# EAGLE board main_brd_2.1 (EAGLE 9.1.0)
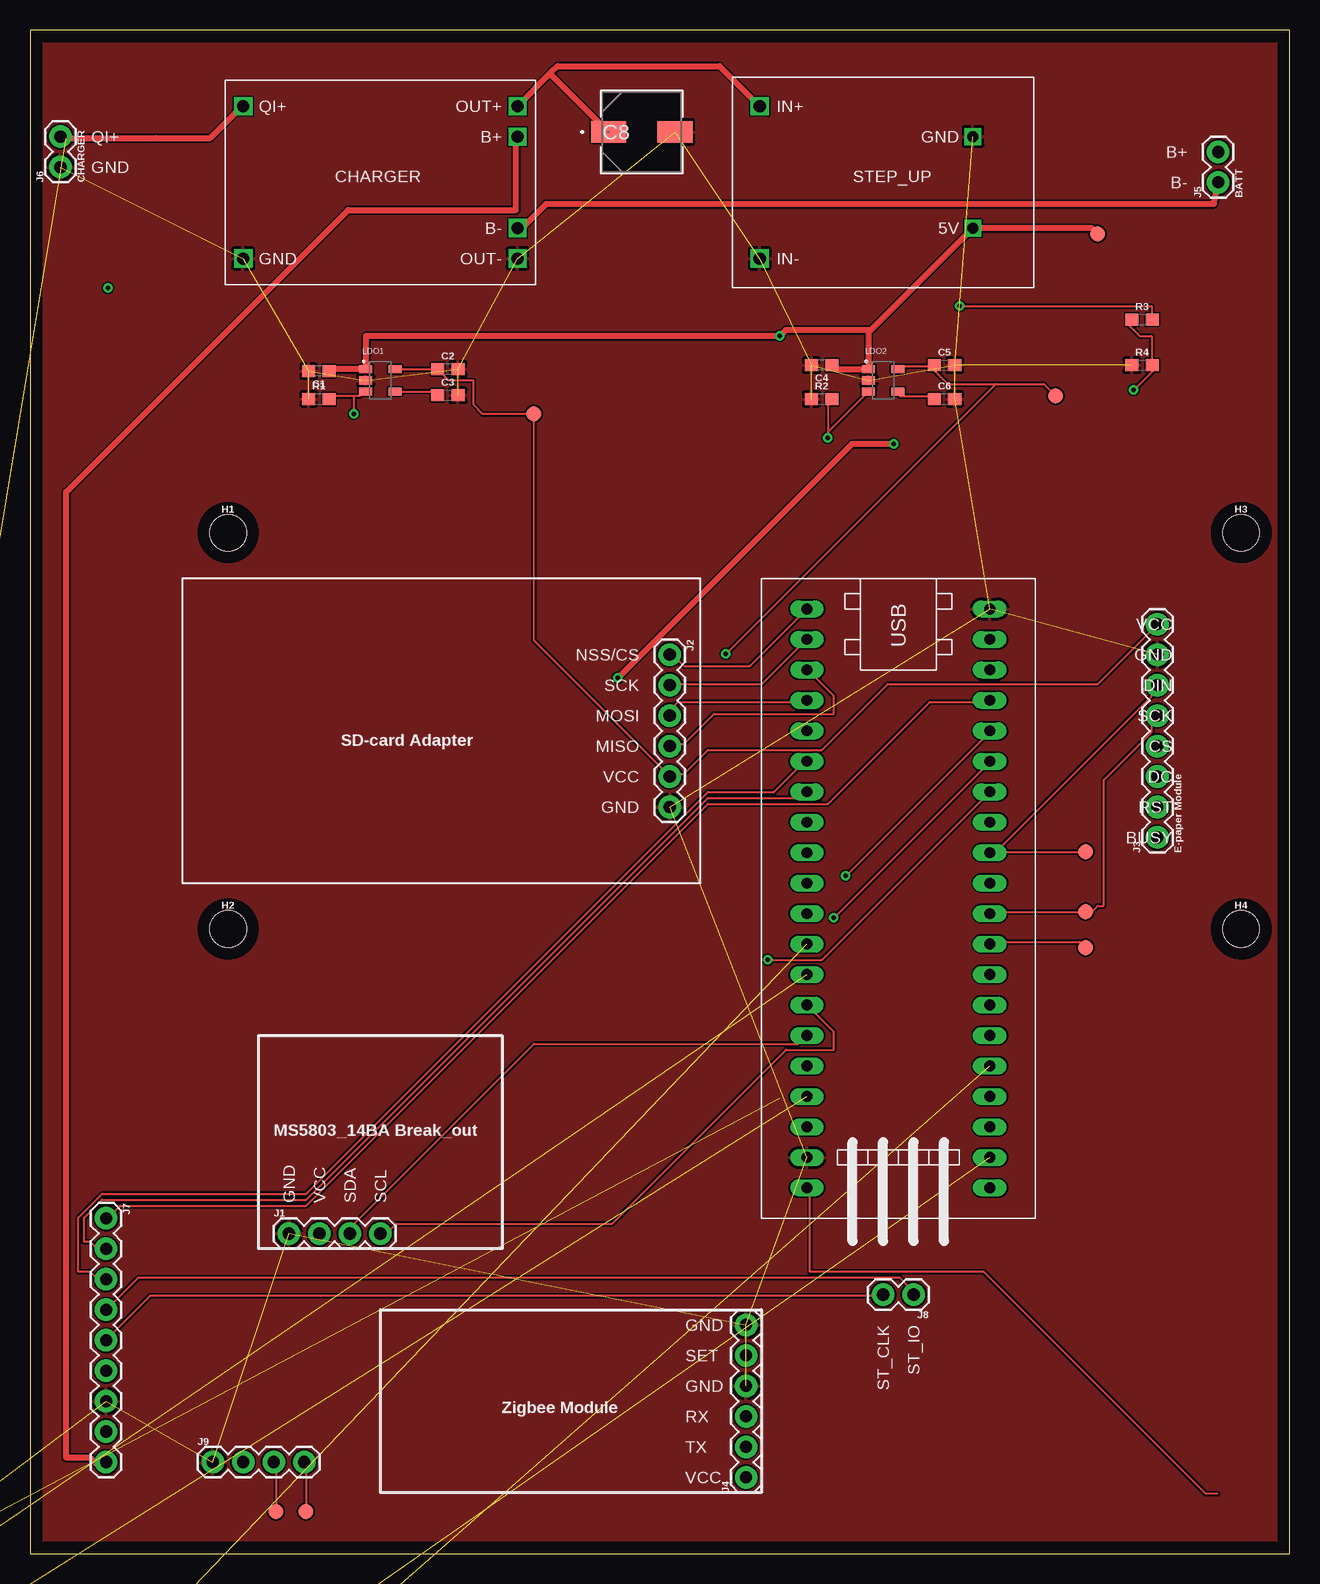
[diagram p0: board, top side]
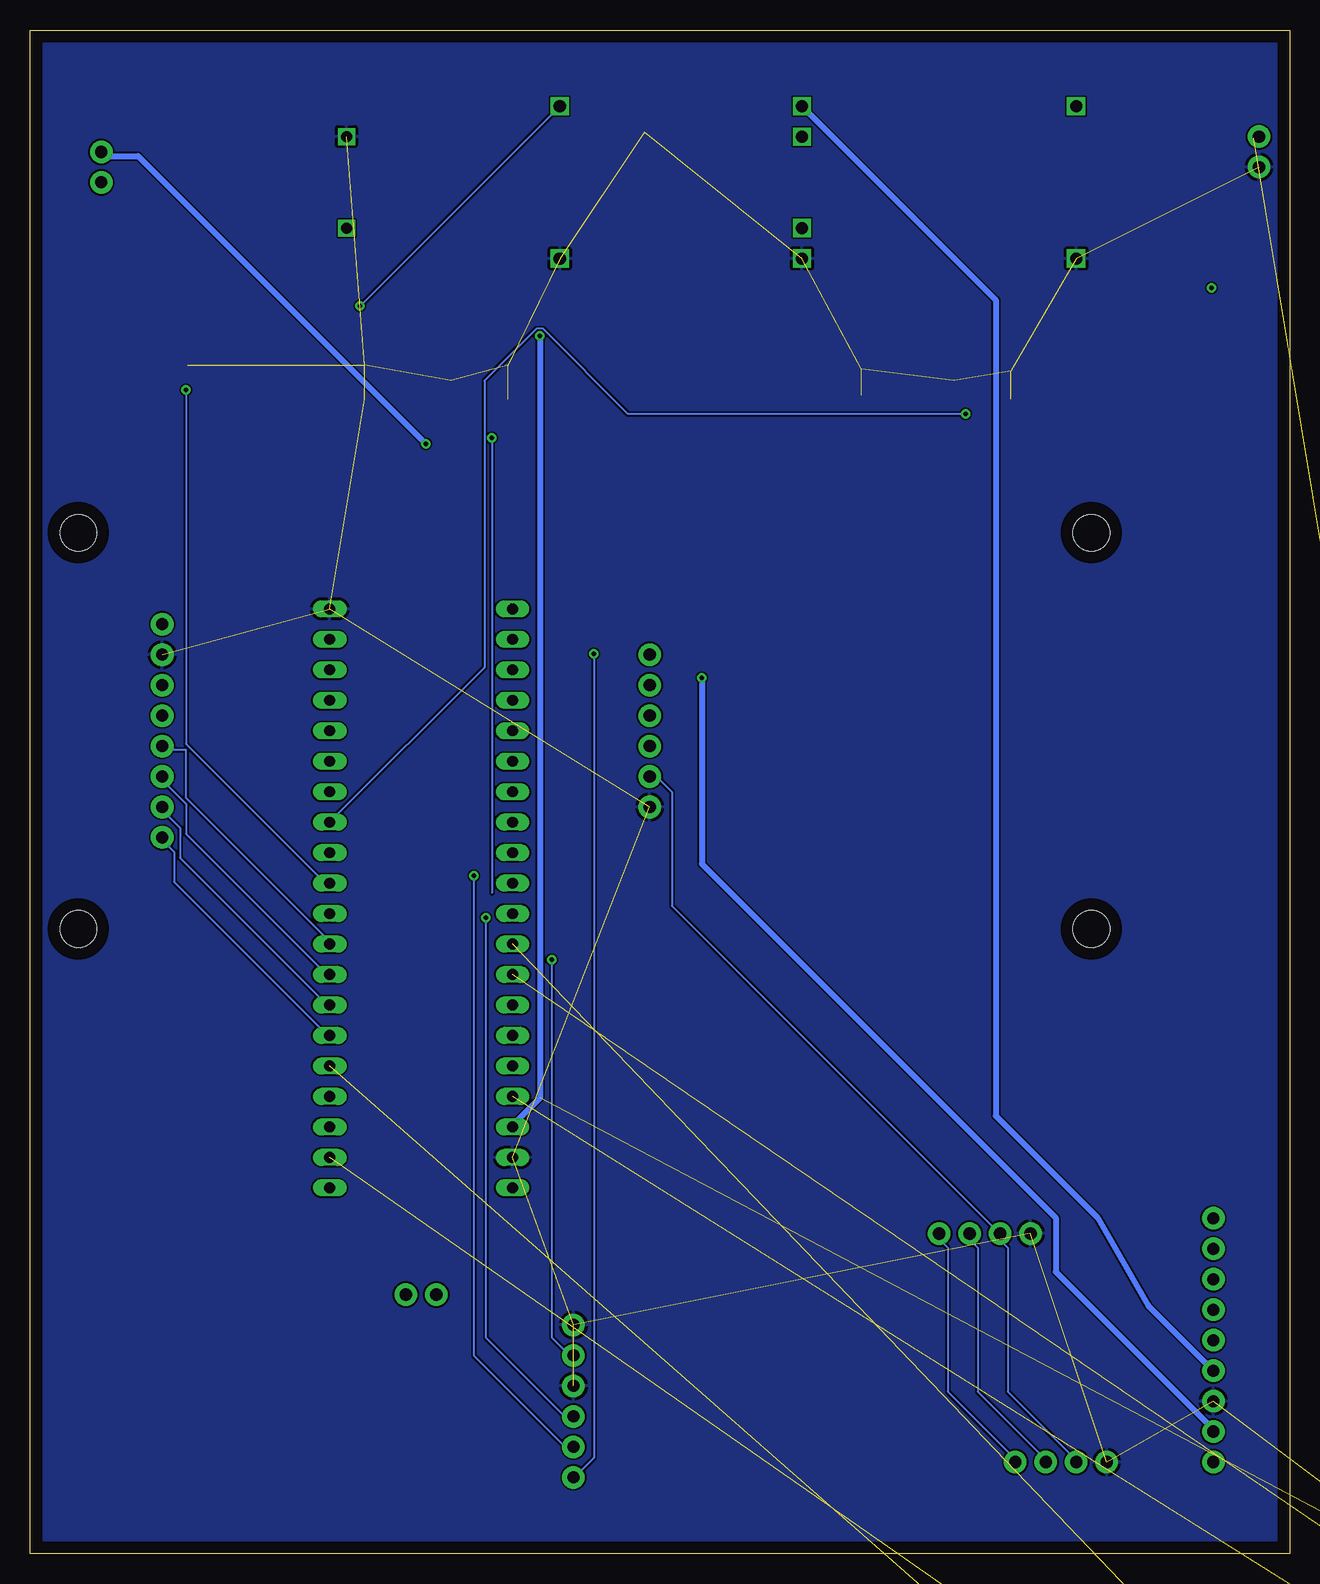
[diagram p1: board, bottom side, seen from below]

Size 105 x 127 mm. Coordinates in mm from the lower left corner, seen from the top.
Outline: 0,0 105,0 105,127 0,127 0,0
Copper layers (1*16): Top 0.035mm / dielectric 1.5mm / Bottom 0.035mm
Design rules "default *": minimum track width 6mil, minimum drill 0.35mm, track to track 6mil, track to pad 6mil, pad to pad 6mil, via to via 6mil, smd to smd 6mil, copper to edge 40mil, drill to drill 6mil, minimum pad ring 10mil, minimum via ring 8mil, stop-mask expansion 4mil, vias tented up to drill 0mil, thermal gap 10mil

## Footprints (pad centres in the part's own frame; a part is rotated, then mirrored left to right if it is on the bottom)
0603 = smd 1.1 x 1: 1 -0.85,0; 2 0.85,0
U2-K-M = smd 2.921 x 1.829: 1 -2.756,0; 2 2.756,0
C0603 = smd 1.1 x 1: 1 -0.85,0; 2 0.85,0
LED_5MM = drill 0.813 pad 1.88: A -1.27,0; K 1.27,0
STAND-OFF-TIGHT = hole 3.048: 0,0
1X04 = drill 1.016 pad 1.88: 1 0,0; 2 2.54,0; 3 5.08,0; 4 7.62,0
1X06 = drill 1.016 pad 1.88: 1 0,0; 2 2.54,0; 3 5.08,0; 4 7.62,0; 5 10.16,0; 6 12.7,0
1X08 = drill 1.016 pad 1.88: 1 0,0; 2 2.54,0; 3 5.08,0; 4 7.62,0; 5 10.16,0; 6 12.7,0; 7 15.24,0; 8 17.78,0
1X02 = drill 1.016 pad 1.88: 1 0,0; 2 2.54,0
1X09 = drill 1.016 pad 1.88: 1 0,0; 2 2.54,0; 3 5.08,0; 4 7.62,0; 5 10.16,0; 6 12.7,0; 7 15.24,0; 8 17.78,0; 9 20.32,0
SOT94P279X129-5N = smd 1.17 x 0.67: 1 -1.22,0.94; 2 -1.22,0; 3 -1.22,-0.94; 4 1.22,-0.94; 5 1.22,0.94
3,81/1,4 = drill 1.397 pad 3.81 octagon: 1 0,0
R0603 = smd 1 x 1.1: 1 -0.85,0; 2 0.85,0
PAD.03X.05 = smd 1.27 x 1.27: P$1 0,0
STM32F103C8T6-MODULE = drill 0.9 long: 3.3V_1 25.4,-7.62; 3.3V_2 -17.78,7.62; 5V 20.32,-7.62; GND_1 22.86,-7.62; GND_2 -20.32,7.62; GND_3 -22.86,7.62; PA_0 15.24,7.62; PA_1 12.7,7.62; PA_2 10.16,7.62; PA_3 7.62,7.62; PA_4 5.08,7.62; PA_5 2.54,7.62; PA_6 0,7.62; PA_7 -2.54,7.62; PA_8 -12.7,-7.62; PA_9 -10.16,-7.62; PA_10 -7.62,-7.62; PA_11 -5.08,-7.62; PA_12 -2.54,-7.62; PA_15 0,-7.62; PB_0 -5.08,7.62; PB_1 -7.62,7.62; PB_3 2.54,-7.62; PB_4 5.08,-7.62; PB_5 7.62,-7.62; PB_6 10.16,-7.62; PB_7 12.7,-7.62; PB_8 15.24,-7.62; PB_9 17.78,-7.62; PB_10 -10.16,7.62; PB_11 -12.7,7.62; PB_12 -22.86,-7.62; PB_13 -20.32,-7.62; PB_14 -17.78,-7.62; PB_15 -15.24,-7.62; PC_13 22.86,7.62; PC_14 20.32,7.62; PC_15 17.78,7.62; RESET -15.24,7.62; VB 25.4,7.62
P8 = drill 0.864 pad 1.372 square: 1 -7.62,7.62 | drill 0.864 pad 1.372: 2 -7.62,5.08; 3 -7.62,2.54; 4 -7.62,0; 5 0,0; 6 0,2.54; 7 0,5.08; 8 0,7.62
DCK5 = smd 1.168 x 0.356: 1 -0.965,0.65; 2 -0.965,0; 3 -0.965,-0.65; 4 0.965,-0.65; 5 0.965,0.65
CHARGE_MODULE = drill 1.016 square: + -11.43,6.35; - -11.43,-6.35; B+ 11.43,3.81; B- 11.43,-3.81; OUT+ 11.43,6.35; OUT- 11.43,-6.35
STEP_UP_99_69 = drill 0.9 square: 5V 7.493,-3.81; GND 7.493,3.81 | drill 1.016 square: IN+ -10.287,6.35; IN- -10.287,-6.35

## Placement (x,y rotation side)
C1  1.0uF  [0603]  24.09,98.56 180 top
C2  1.0uF  [0603]  34.83,98.75 0 top
C3  22nF  [0603]  34.83,96.56 0 top
C4  1.0uF  [0603]  66,99.06 180 top
C5  1.0uF  [0603]  76.24,99.06 0 top
C6  22nF  [0603]  76.24,96.25 0 top
C8  UWT1C221MCL1GSU2-K-M  [U2-K-M]  51,118.5 0 top
C9  .1u  [C0603]  -18,-51 0 top  (outside the outline)
D1  [LED_5MM]  -23.4,-49.2 0 top  (outside the outline)
D2  [LED_5MM]  -30,-49.2 0 top  (outside the outline)
D3  [LED_5MM]  -36.6,-49.2 0 top  (outside the outline)
H1  STAND-OFFTIGHT  [STAND-OFF-TIGHT]  16.51,85.09 0 top
H2  STAND-OFFTIGHT  [STAND-OFF-TIGHT]  16.51,52.07 0 top
H3  STAND-OFFTIGHT  [STAND-OFF-TIGHT]  100.97,85.09 0 top
H4  STAND-OFFTIGHT  [STAND-OFF-TIGHT]  100.97,52.07 0 top
J1  MS5803_14BA Break_out  [1X04]  21.59,26.67 0 top
J2  SD-card Adapter  [1X06]  53.34,74.93 270 top
J3  E-paper Module  [1X08]  93.98,59.69 90 top
J4  Zigbee Module  [1X06]  59.69,6.35 90 top
J5  BATT  [1X02]  99.06,114.3 90 top
J6  CHARGER  [1X02]  2.54,115.57 90 top
J7  POGO_PINS  [1X09]  6.35,27.94 270 top
J8  ST-LINK  [1X02]  73.66,21.59 180 top
J9  additional I2C bus  [1X04]  15.24,7.62 0 top
LDO1  RT9193-33GB  [SOT94P279X129-5N]  29.21,97.79 0 top
LDO2  RT9193-33GB  [SOT94P279X129-5N]  71.12,97.79 0 top
PAD1  [3,81/1,4]  -37.2,-82.8 0 top  (outside the outline)
PAD2  [3,81/1,4]  -37.2,-89.4 0 top  (outside the outline)
R1  22k  [0603]  24.09,96.25 0 top
R2  22k  [0603]  66,96.25 0 top
R3  22k  [0603]  92.71,102.87 0 top
R4  22k  [0603]  92.71,99.06 0 top
R5  330  [R0603]  -18,-36.5 0 top  (outside the outline)
R6  100k  [R0603]  -18,-40 0 top  (outside the outline)
R7  10k  [R0603]  -18,-43.5 0 top  (outside the outline)
R8  10k  [R0603]  -18,-26 0 top  (outside the outline)
R9  10k  [R0603]  -18,-29.5 0 top  (outside the outline)
R10  100k  [R0603]  -18,-33 0 top  (outside the outline)
R11  10k  [R0603]  -38.4,-56.4 0 top  (outside the outline)
R12  10k  [R0603]  -38.4,-60 0 top  (outside the outline)
R13  10k  [R0603]  -38.4,-65.4 0 top  (outside the outline)
R14  10k  [R0603]  -38.4,-70.8 0 top  (outside the outline)
R15  10k  [R0603]  -38.4,-76.2 0 top  (outside the outline)
TP1  TEST-POINT3X5  [PAD.03X.05]  89,110 0 top
TP2  TEST-POINT3X5  [PAD.03X.05]  20.5,3.5 0 top
TP3  TEST-POINT3X5  [PAD.03X.05]  23,3.5 0 top
TP4  TEST-POINT3X5  [PAD.03X.05]  42,95 0 top
TP5  TEST-POINT3X5  [PAD.03X.05]  85.5,96.5 0 top
TP6  TEST-POINT3X5  [PAD.03X.05]  88,58.5 0 top
TP7  TEST-POINT3X5  [PAD.03X.05]  88,53.5 0 top
TP8  TEST-POINT3X5  [PAD.03X.05]  88,50.5 0 top
U1  STM32F103C8T6-MODULE  [STM32F103C8T6-MODULE]  72.39,55.88 270 top
U2  LF411CP  [P8]  -11,-6 0 top  (outside the outline)
U3  TS5A4595DCKR  [DCK5]  -15.5,-11 0 top  (outside the outline)
U$1  4065_BREAKOUT  [CHARGE_MODULE]  29.21,114.3 0 top
U$2  STEP_UP  [STEP_UP_99_69]  71.12,114.3 0 top

## Library data of the parts
C1 C2 C4 C5 = SparkFun-Capacitors; PROD_ID: CAP-13930
C3 C6 = SparkFun-Capacitors; PROD_ID: CAP-07885
C8 = capacitor_220uF; MANUFACTURER_PART_NUMBER: UWT1C221MCL1GS; VENDOR: Nichicon
C9 = eagle-ltspice; SPICEMODEL: NONE; SPICEPREFIX: C
D1-D3 = SparkFun-LED
H1-H4 = SparkFun-Hardware
J1 J9 = SparkFun-Connectors; PROD_ID: CONN-09696
J2 J4 = SparkFun-Connectors; PROD_ID: CONN-08437
J3 = SparkFun-Connectors; PROD_ID: CONN-08438
J5-J8 TP1-TP8 = SparkFun-Connectors
LDO1 LDO2 = RT9193-33GB; DESCRIPTION: RT9193 Series 300 mA 3.3 V Ultra-Low Noise Ultra-Fast CMOS LDO Regulator-SC-70-5; DIGI-KEY_PART_NUMBER: 1028-1014-1-ND; DIGI-KEY_PURCHASE_URL: https://www.digikey.com/product-detail/en/richtek-usa-inc/RT9193-33GB/1028-1014-1-ND/2470073?utm_source=snapeda&utm_medium=aggregator&utm_campaign=symbol; MF: Richtek USA; MP: RT9193-33GB; PACKAGE: SOT-23-5 Richtek
PAD1 PAD2 = wirepad
R1-R4 = SparkFun-Resistors; PROD_ID: RES-07853
R5-R15 = eagle-ltspice; SPICEMODEL: NONE; SPICEPREFIX: R
U1 = stm32f103c8t6_module
U2 = Reef_pin; MANUFACTURER_PART_NUMBER: LF411CP; VENDOR: Texas Instruments
U3 = Reef_pin; MANUFACTURER_PART_NUMBER: TS5A4595DCKR; VENDOR: Texas Instruments
U$1 U$2 = coral_power

## Nets
3.3V: U1.3.3V_1
+5V: C1.1 C4.1 C9.1 LDO1.1 LDO2.1 R9.1 R10.2 TP1.P$1 U1.5V U2.7 U3.5 U$2.5V
ADC_BATT: R3.1 R4.2 U1.PA_6
B+0: J7.9 U$1.B+
B+1: J5.2 J7.8
B-: J5.1 U$1.B-
E-INK_BUSY: J3.1 U1.PA_1
E-INK_DC: J3.3 U1.PA_3
E-INK_RST: J3.2 U1.PA_2
GND: C1.2 C2.2 C3.2 C4.2 C5.2 C6.2 C8.2 C9.2 J1.1 J2.6 J3.7 J4.4 J4.6 J6.1 J7.7 J9.1 LDO1.2 LDO2.2 PAD2.1 R1.1 R2.1 R4.1 R7.1 R8.1 R11.1 R12.1 R14.2 R15.2 U1.GND_1 U1.GND_3 U2.4 U3.3 U$1.- U$1.OUT- U$2.GND U$2.IN-
I2C_SCL: J1.4 J9.4 TP3.P$1 U1.PB_6
I2C_SDA: J1.3 J9.3 TP2.P$1 U1.PB_7
LD02_EN: U1.PB_8
LDO1_3.3V: C2.1 J1.2 J2.5 J3.8 J9.2 LDO1.5 TP4.P$1
LDO1_EN: LDO1.3 R1.2 U1.PB_0
LDO2_3.3V: C5.1 J4.1 LDO2.5 TP5.P$1
LDO2_EN: LDO2.3 R2.2
N$1: C6.1 LDO2.4
N$2: C3.1 LDO1.4
N$4: R5.2 U3.1
N$5: R6.1 R7.2 R9.2 U2.3
N$6: D3.A U1.PC_13
N$7: D3.K R15.1
N$8: PAD1.1 U3.2
QI+: D1.A J6.2 R13.1 U$1.+
READ_CHARGE: R11.2 R13.2 U1.PB_4
READ_WET: D2.A R6.2 R12.2 U1.PB_5 U2.6
RST: J7.1 U1.RESET
RX: J7.2 U1.PA_10
SPI1_MOSI: J3.6 TP6.P$1 U1.PA_7
SPI1_NSS/CS: J3.4 TP8.P$1 U1.PA_4
SPI1_SCK: J3.5 TP7.P$1 U1.PA_5
SPI2_MISO: J2.4 U1.PB_14
SPI2_MOSI: J2.3 U1.PB_15
SPI2_NSS/CS: J2.1 U1.PB_12
SPI2_SCK: J2.2 U1.PB_13
ST_CLK: J7.5 J8.2
ST_IO: J7.4 J8.1
SWITCH_OUT: R5.1 R10.1 U2.2
TX: J7.3 U1.PA_9
V_CHARGE: C8.1 J7.6 R3.2 U$1.OUT+ U$2.IN+
WATER_EN: R8.2 U1.PB_9 U3.4
WKUP: D1.K D2.K R14.1 U1.PA_0
ZIGBEE_RX: J4.3 U1.PB_10
ZIGBEE_SET: J4.5 U1.PB_1
ZIGBEE_TX: J4.2 U1.PB_11

## Tracks (layer width: path | path; a pad name or v marks a point on that pad's centre or on a via)
3.3V
  Top 0.152: 99,5 98,5 79.5,23.5 65,23.5 65,30 U1.3.3V_1
+5V  (via drill 0.35)  (5 unrouted)
  Top 0.152: LDO1.1 | 25.11,98.73 C1.1
  Top 0.5: TP1.P$1 88.51,110.49 U$2.5V 69.9,101.78 | LDO1.1 28,101.5 v62.5,101.5 63,102 69.9,102 69.9,101.78 | LDO1.1 25.11,98.73 | 69.9,101.78 LDO2.1 67.18,98.73 C4.1
  Bottom 0.5: U1.5V 64.5,36 62.5,38 v62.5,101.5
ADC_BATT  (via drill 0.35)
  Top 0.152: R3.1 91.5,102.5 92.5,101.5 93.5,101.5 93.5,99.5 R4.2 94,99 v92,97
  Bottom 0.152: v92,97 92,67.5 80.5,56 U1.PA_6
B+0
  Top 0.152: 6,7.5 5.5,7.5 | 40.5,118 U$1.B+
  Top 0.5: 40.5,118 40.5,112 26.5,112 3,88.5 3,8 5,8 5.5,7.5 | 6,7.5 J7.9
B+1  (via drill 0.35)
  Top 0.5: v49,73 68.5,92.5 v72,92.5
  Bottom 0.152: 6.5,10.5 J7.8
  Bottom 0.5: 6.5,10.5 19.5,23.5 19.5,28 49,57.5 v49,73 | v72,92.5 96,116.5 99,116.5 J5.2
B-
  Top 0.5: U$1.B- 41,110.5 43,112.5 98.7,112.5 J5.1
E-INK_BUSY
  Bottom 0.152: U1.PA_1 80.5,43.5 93,56 93,58.5 93.5,59 93.5,59.5 J3.1
E-INK_DC
  Bottom 0.152: U1.PA_3 80.5,48.5 92,60 92,62.5 93.5,64 93.5,64.5 J3.3
E-INK_RST
  Bottom 0.152: U1.PA_2 80.5,46 92.5,58 92.5,60.5 93.5,61.5 93.5,62 J3.2
GND  (35 unrouted)
  pour Top: -5,125 1,131 2.5,131 106.5,131 112.5,125 112.5,0 104.5,-8 1,-8 -3,-4 -5,-2 -5,123
  pour Bottom: 1.5,132.5 106.5,132.5 113,126 113,2.5 102.5,-8 0.5,-8 -9.5,2 -9.5,121.5
I2C_SCL
  Top 0.152: TP3.P$1 23,7.5 J9.4 | U1.PB_6 65,45.5 67,43.5 67,42 63,42 48.5,27.5 30.5,27.5 30,27 29.5,27 J1.4
  Bottom 0.152: J9.4 23,8 28.5,13.5 28.5,25.5 29,26 29,26.5 J1.4
I2C_SDA
  Top 0.152: TP2.P$1 20.5,7.5 J9.3 | U1.PB_7 64.5,43 64,42.5 42,42.5 26.5,27 J1.3
  Bottom 0.152: J9.3 20.5,8 26,13.5 26,25.5 26.5,26 26.5,26.5 J1.3
LDO1_3.3V
  Top 0.152: J3.8 93.5,77 89,72.5 71.5,72.5 66,67 56.5,67 54.5,65 53.5,65 J2.5 42,76.11 TP4.P$1 37.73,95 36.96,95.77 36.96,97.79 34.94,97.79 C2.1 33.96,98.73 LDO1.5
  Bottom 0.152: J9.2 18,8 23.5,13.5 23.5,25.5 24,26 24,26.5 J1.2 24.5,27 51.5,54 51.5,63.5 53,65 J2.5
LDO1_EN  (via drill 0.35)
  Top 0.152: 27,96.5 27.5,96.5 27.52,96.85 LDO1.3 | 27,96.5 25,96.5 R1.2 | v27,95 27,96.5
  Bottom 0.152: U1.PB_0 67.11,73.86 67.11,97.75 62.75,102.11 62.25,102.11 55.14,95 v27,95
LDO2_3.3V  (via drill 0.35)
  Top 0.152: 75,99 72.5,99 LDO2.5 | TP5.P$1 84.5,97.5 80.5,97.5 | 80.5,97.5 76.5,97.5 75,99 | 75,99 C5.1 | 80.5,97.5 v58,75
  Bottom 0.152: v58,75 58,8 59.5,6.5 J4.1
LDO2_EN  (via drill 0.35)
  Top 0.152: R2.2 66.5,95.9 v66.5,93 66.5,93.5 70,97 LDO2.3
  Bottom 0.152: v66.5,93 66.5,55.07
N$1
  Top 0.152: C6.1 75,96.5 72.5,96.5 72,97 LDO2.4
N$2
  Top 0.152: LDO1.4 33.69,96.85 C3.1
N$3  (via drill 0.35)
  other vias: 6.5,105.5
N$4  (1 unrouted)
N$5  (3 unrouted)
N$6  (1 unrouted)
N$7  (1 unrouted)
N$8  (1 unrouted)
QI+  (2 unrouted)
  Top 0.152: 3,118 J6.2
  Top 0.5: 3,118 10.5,118 15,118 17.5,120.5 U$1.+
READ_CHARGE  (2 unrouted)
READ_WET  (4 unrouted)
RST
  Top 0.152: U1.RESET 80,71 75,71 66.5,62.5 56.5,62.5 23,29 7.5,29 6.5,28 J7.1
RX
  Top 0.152: U1.PA_10 64.5,63.5 64,63 56.5,63 23,29.5 6,29.5 4.5,28 4.5,26 5,26 5.5,25.5 6,25.5 J7.2
SPI1_MOSI
  Top 0.152: 80.5,58.5 TP6.P$1 | 80.5,58.5 93.5,71.5 93.5,72 J3.6 | 80.5,58.5 U1.PA_7
SPI1_NSS/CS
  Top 0.152: TP8.P$1 87.5,51 80.5,51 U1.PA_4
  Bottom 0.152: J3.4 93.5,67 92,67 92,63 80.5,51.5 80.5,51 U1.PA_4
SPI1_SCK
  Top 0.152: U1.PA_5 80.5,53.5 TP7.P$1 88.5,53.5 89,54 89.5,54 89.5,64.5 93.5,68.5 93.5,69.5 J3.5
SPI2_MISO
  Top 0.152: U1.PB_14 65,73.5 67,71.5 67,70 57,70 54.5,67.5 53.5,67.5 J2.4
SPI2_MOSI
  Top 0.152: U1.PB_15 64.5,71 54,71 53,70 J2.3
SPI2_NSS/CS
  Top 0.152: U1.PB_12 64.5,78.5 60,74 54.5,74 54,74.5 53.5,74.5 J2.1
SPI2_SCK
  Top 0.152: U1.PB_13 64.5,76 61,72.5 53.5,72.5 J2.2
ST_CLK
  Top 0.152: J7.5 6.5,18 10,21.5 71,21.5 J8.2
ST_IO
  Top 0.152: J7.4 6.5,20.5 9,23 72.5,23 73.5,22 J8.1
SWITCH_OUT  (2 unrouted)
TX
  Top 0.152: U1.PA_9 64.5,66 62,63.5 56.5,63.5 23,30 6,30 4,28 4,23.5 5,23.5 5.5,23 6,23 J7.3
V_CHARGE  (via drill 0.35)
  Top 0.152: v77.5,104 93.5,104 93.5,103 R3.2 | 43.49,123.25 43.49,123.5
  Top 0.5: U$1.OUT+ 43.49,123.5 43.99,124 57.48,124 U$2.IN+ | C8.1 43.49,123.25
  Bottom 0.152: v77.5,104 61,120.5 U$2.IN+ | 40.5,120.5 U$1.OUT+
  Bottom 0.5: 40.5,120.5 24.5,104.5 24.5,36.5 16,28 11.76,20.65 J7.6
WATER_EN  (2 unrouted)
WKUP  (3 unrouted)
ZIGBEE_RX  (via drill 0.35)
  Top 0.152: v67,53 80,66 U1.PB_10
  Bottom 0.152: v67,53 67,18 60,11 J4.3
ZIGBEE_SET  (via drill 0.35)
  Top 0.152: v61.5,49.5 66,49.5 U1.PB_1
  Bottom 0.152: v61.5,49.5 61.5,18 60,16.5 J4.5
ZIGBEE_TX  (via drill 0.35)
  Top 0.152: v68,56.5 80,68.5 U1.PB_11
  Bottom 0.152: v68,56.5 68,16.5 60,8.5 J4.2

## Text on the board
tPlace: QI+ | OUT+ | IN+ | QI+ | B+ | GND | B+ | GND | CHARGER | STEP_UP | B- | B- | 5V | GND | OUT- | IN- | VCC | NSS/CS | GND | SCK | DIN | MOSI | SCK | MISO | CS | VCC | DC | GND | RST | BUSY | GND | VCC | SDA | SCL | GND | ST_CLK | ST_IO | SET | GND | RX | TX | VCC